# Altium PCB Power.PcbDoc
Units mil, origin at the board's own origin, x right, y up, seen from the top; angles counter-clockwise.
Board outline 2440 x 3265 mil, 2 copper layers (Top Layer, Bottom Layer); 32 components, 26 nets, 96 pads, 39 vias.
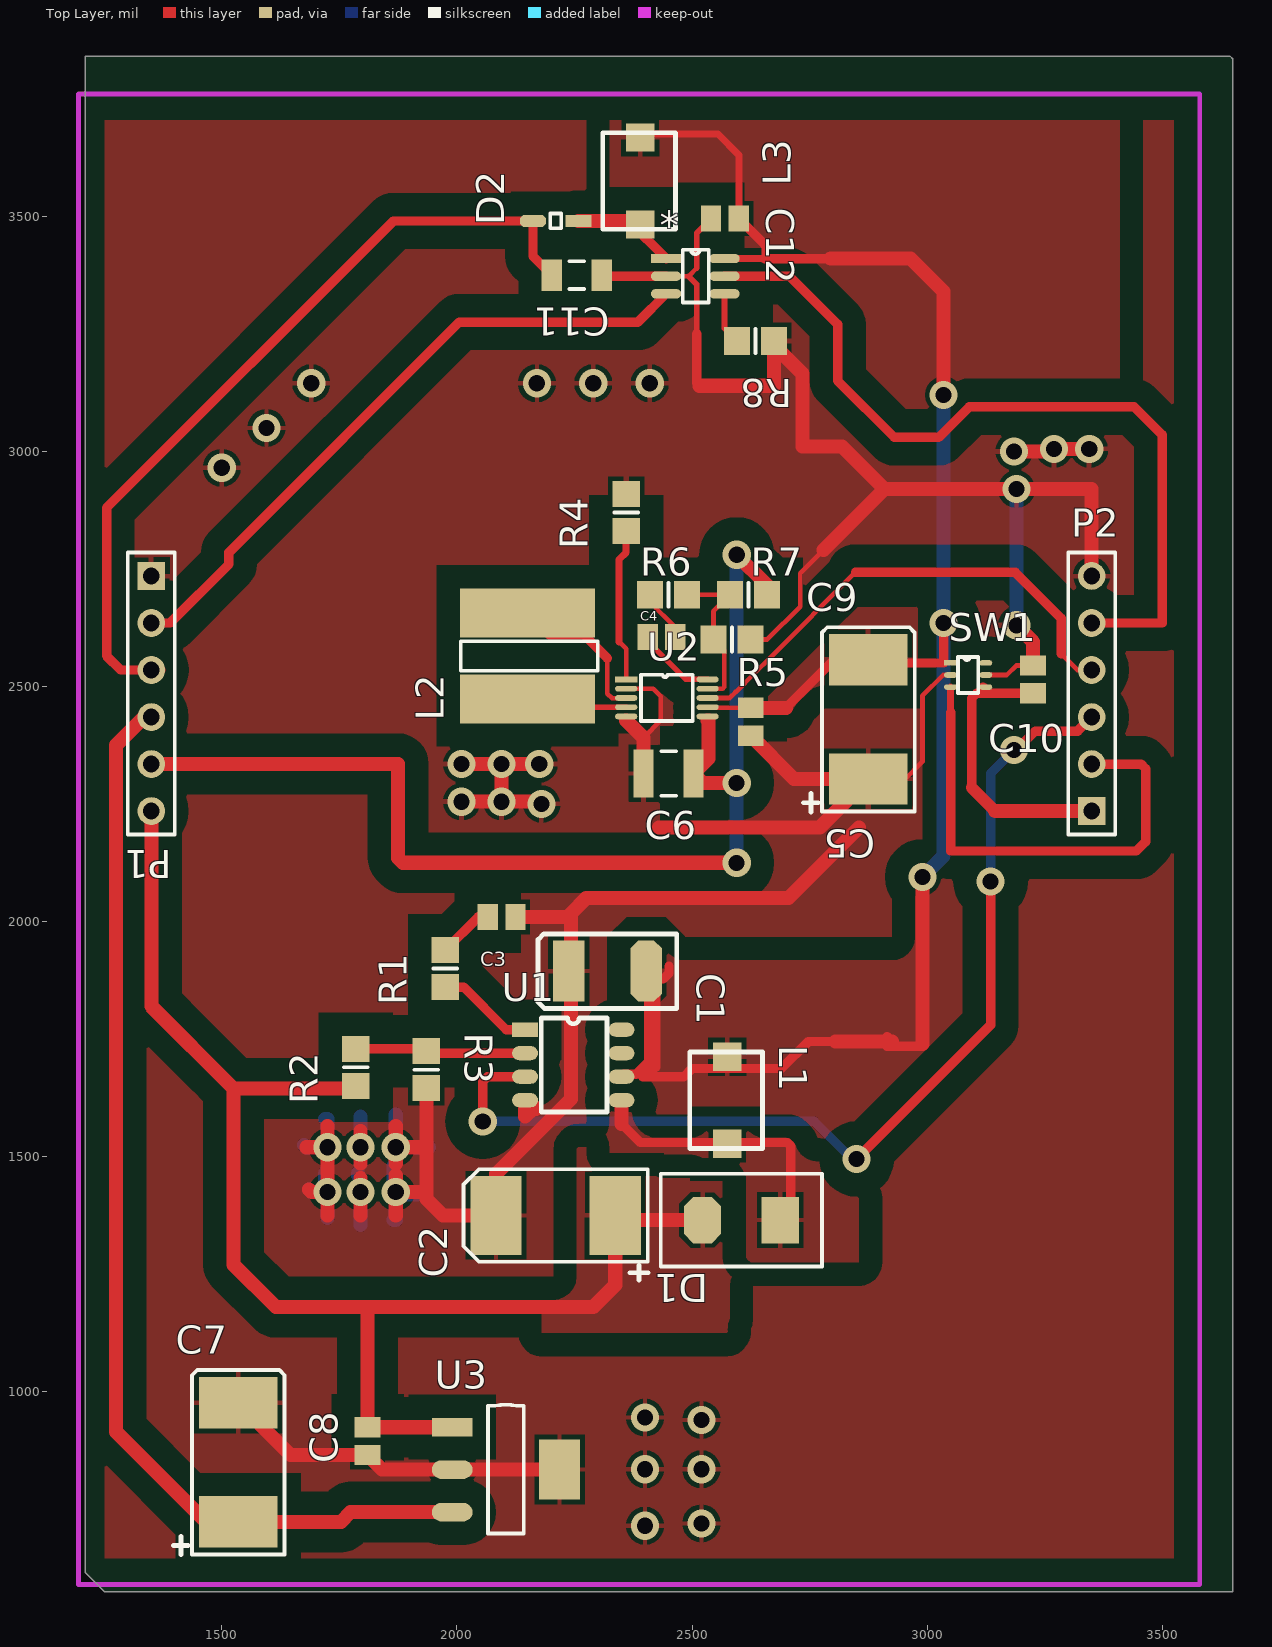
[diagram p0: Top Layer view]
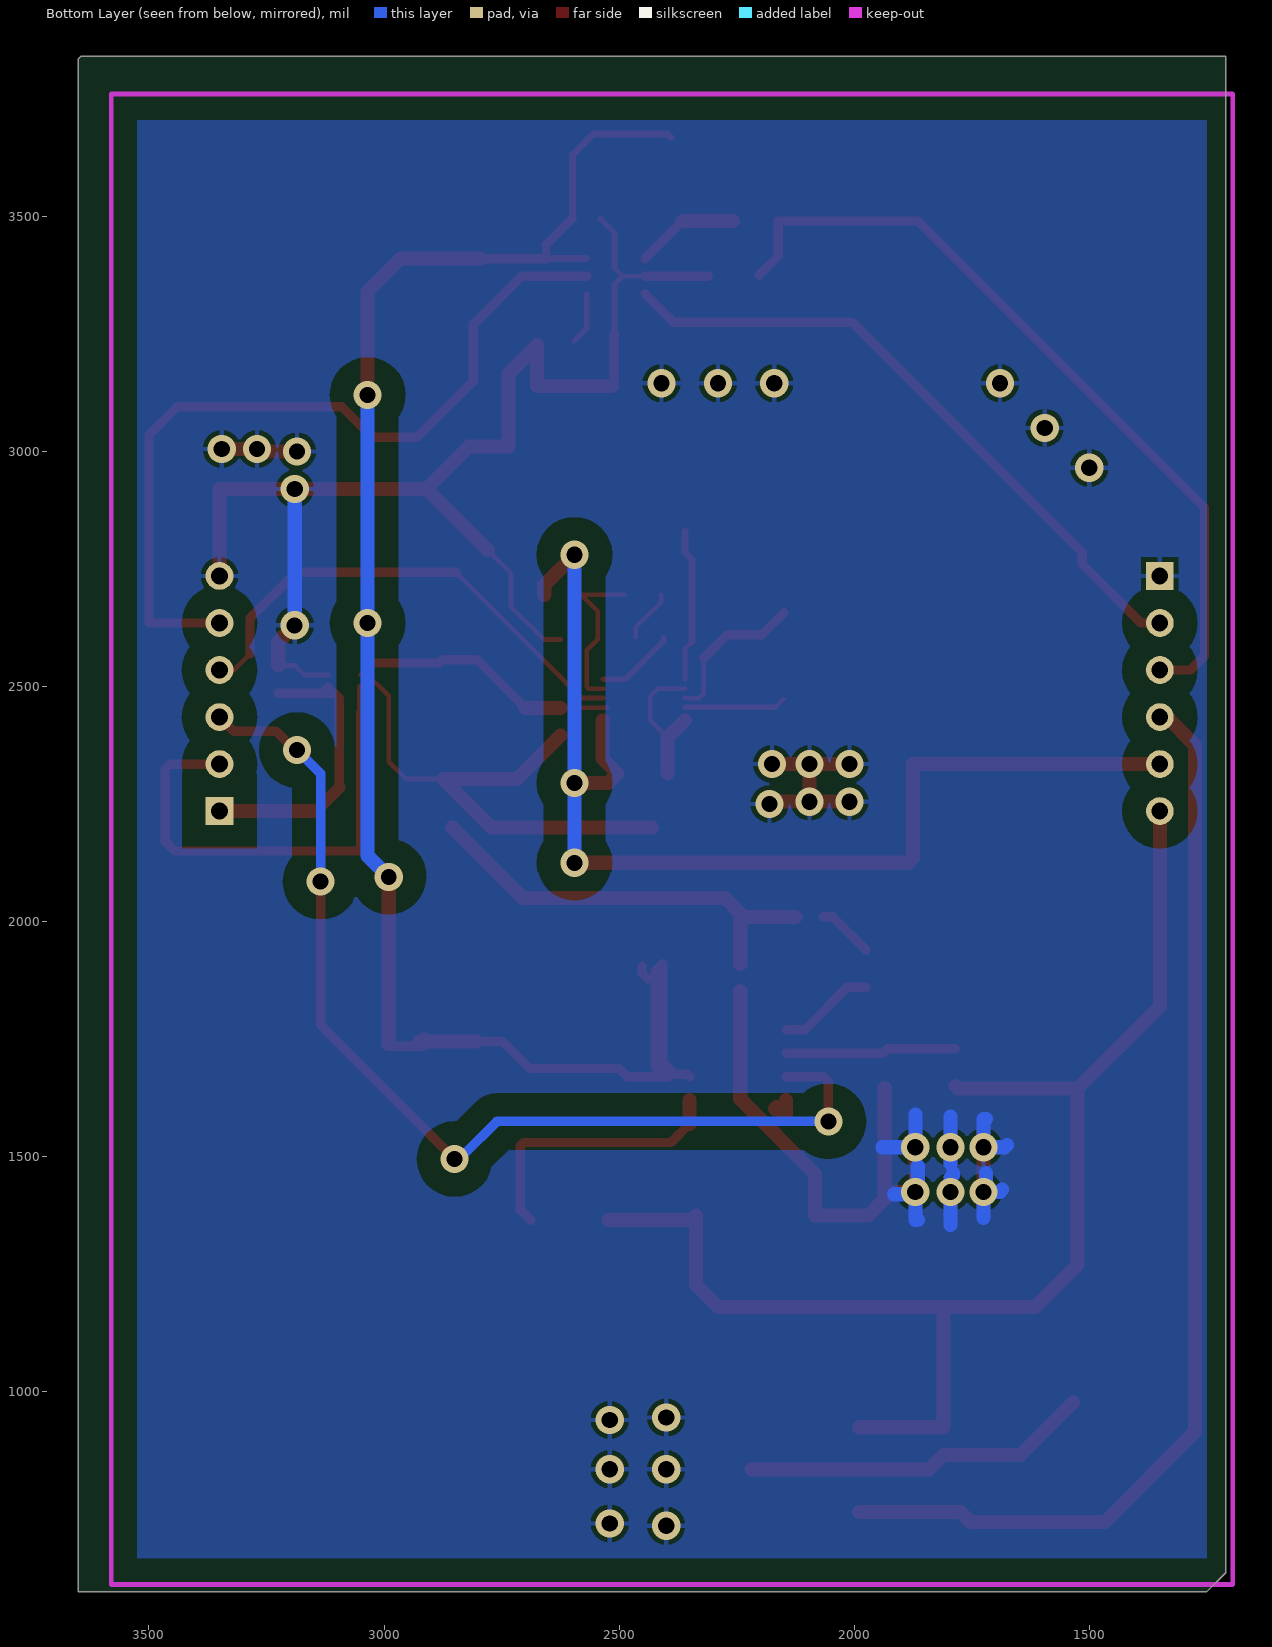
[diagram p1: Bottom Layer view, seen from below]

## Layer stack, top to bottom
Top Layer: signal copper 1.4
Dielectric: dielectric 12.6, FR-4, Dk 4.8
Bottom Layer: signal copper 1.4

## Board outline
1250,575 1210,615 1210,3840 3645,3840 3650,3835 3650,575

## Design rules (kind name [scope] priority, off if disabled: settings)
Clearance Polygon [InPoly] p1: gap=50
Clearance [All] p2: gap=7
ComponentClearance [All] p1: gap=5 collisioncheckmode=3 verticalgap=10 showdistances=FALSE
PolygonConnect [All] p1: connectstyle=Relief reliefconductorwidth=10 reliefentries=4 polygonreliefangle="90 Angle" airgapwidth=10
RoutingVias [All] p1: holewidth=28 width=50 viastyle="Through Hole" minholewidth=28 minwidth=50 maxholewidth=28 maxwidth=50
SilkToSilkClearance [All] p1: silktosilkclearance=5
SilkscreenOverComponentPads [All] p1: minsilkscreentomaskgap=10
SolderMaskExpansion [All] p1: expansion=4
Width [All] p1: maxlimit=30 minlimit=10 preferedwidth=20
25 further rules are at their usual default settings.

## Components (designator, comment, footprint, x,y, rotation, side; value= is the part's Value field where it differs from the comment)
* "LT1932" SOT6 2445,3410 r0 top
C1 "Cap" C0805 2095,2010 r180 top
C2 "220u" C2917 2210,1375 r180 top
C3 "47u" C2312 2320,1895 r180 top
C4 "1500pF" C0805 2435,2605 r0 top
C5 "10u" C0805 2625,2425 r90 top
C6 "22u" C1210 2450,2315 r0 top
C7 "220u" C2917 1535,850 r90 top
C8 ".47u" C0805 1810,895 r90 top
C9 "220u" C2917 2875,2430 r90 top
C10 "4.7uF" C0805 3225,2515 r270 top
C11 "1u" C1206 2255,3375 r180 top
C12 "4.7u" C0805 2570,3495 r0 top
D1 "D Schottky" ShottkeyDiode 2605,1365 r180 top
D2 "D Schottky" ZHCSDiode 2210,3490 r180 top
L1 "4.7u" Inductor 2575,1620 r270 top
L2 "10uH" "10uH Inductor" 2150,2565 r90 top
L3 "4.7u" Inductor 2390,3575 r270 top
P1 "Header 6" HDR1X6 1350,2735 r270 top
P2 "Header 6" HDR1X6 3350,2235 r90 top
R1 "47k" 6-0805_M 1975,1900 r90 top
R2 "309k" 6-0805_M 1785,1690 r90 top
R3 "100K" 6-0805_M 1935,1685 r270 top
R4 "60.4k" 6-0805_M 2360,2870 r90 top
R5 "200k" 6-0805_M 2585,2600 r180 top
R6 "15k" 6-0805_M 2450,2695 r0 top
R7 "340k" 6-0805_M 2620,2695 r0 top
R8 "1.27k" 6-0805_M 2635,3235 r180 top
SW1 "SIP32411" "SOT6 - DUPLICATE" 3050,2550 r0 top
U1 "LTC1308ACS8" SOP8_LTC1308A 2145,1770 r0 top
U2 "LTC3440" MS10 2360,2515 r0 top
U3 "LM3940" LDO 1990,925 r0 top

## Footprints (in the part's own frame and the unit in brackets; to place one, negate y for a bottom-side part, rotate by r counter-clockwise, add the part's x,y. Pads: shape width x height; smd on the part's side, far side on the other; paste and mask are expansions set on the pad)
6-0805_M [mm] "Chip Resistor, Body 2.0x1.2mm, IPC Low Density"
  rect 1.4x1.5 smd: 1(-1,0) 2(1,0)
  silkscreen extent 0,-0.65 0,0.65, body extent -1.07,-0.7 1.07,0.7, height 0.7
"10uH Inductor" [mm]
  rect 2.65x7.3 smd: 1(-2.325,0) 2(2.325,0)
  silkscreen extent -0.8,-3.8 0.8,3.6
C0805 [mm] "Chip Capacitor, Body 2.0x1.3mm, IPC High Density"
  rect 1.1x1.4 smd: 1(-0.75,0) 2(0.75,0)
  body extent -1.1,-0.72 1.1,0.72, height 1.4
C1206 [mm] "Chip Capacitor, Body 3.2x1.6mm, IPC High Density"
  rect 1.1x1.7 smd: 1(-1.35,0) 2(1.35,0)
  silkscreen extent -0.4,-0.75 0.4,0.75, body extent -1.7,-0.9 1.7,0.9, height 1.3
C1210 [mm] "Chip Capacitor, Body 3.2x2.5mm, IPC High Density"
  rect 1.1x2.6 smd: 1(-1.35,0) 2(1.35,0)
  silkscreen extent -0.4,-1.2 0.4,1.2, body extent -1.7,-1.35 1.7,1.35, height 1.3
C2312 [mil]
  oct 66.93x130 smd: 1(-82.5,0)
  rect 66.93x130 smd: 2(82.5,0)
  silkscreen extent -148,-79 148,80
C2917 [mm]
  rect 2.77x4.25 smd: 1(-3.22,0) 2(3.22,0)
  silkscreen extent -5,-2.5 4.98,3.5
HDR1X6 [mm] "Connector; Header; 6 Position"
  rect 1.5x1.5 hole 0.9: 1(0,0)
  round 1.5 hole 0.9: 2(2.54,0) 3(5.08,0) 4(7.62,0) 5(10.16,0) 6(12.7,0)
  silkscreen extent -1.27,-1.27 13.97,1.27
Inductor [mil]
  rect 60x60 smd: 1(-92.5,0) 2(92.5,0)
  silkscreen extent -103,-80 103,75
LDO [mm]
  rect 2.2x1 smd: 1(0,0)
  oval 2.2x1 smd: 2(0,-2.3) 3(0,-4.6)
  rect 2.2x3.25 smd: 4(5.8,-2.3)
  silkscreen extent 1.93,-5.75 3.87,1.2
MS10 [mm]
  rect 1.2x0.31 smd: 1(0,0)
  oval 1.2x0.31 smd: 2(0,-0.5) 3(0,-1) 4(0,-1.5) 5(0,-2) 6(4.4,-2) 7(4.4,-1.5) 8(4.4,-1) 9(4.4,-0.5) 10(4.4,0)
  silkscreen extent 0.8,-2.25 3.6,0.25
ShottkeyDiode [mm]
  rect 2x2.5 smd: A(-2.1,0)
  oct 2x2.5 smd: K(2.1,0)
  silkscreen extent -4.35,-2.5 4.35,2.5
SOP8_LTC1308A [mil]
  rect 55x30 smd: 1(0,0)
  oval 55x30 smd: 2(0,-50) 3(0,-100) 4(0,-150) 5(205,-150) 6(205,-100) 7(205,-50) 8(205,0)
  silkscreen extent 34,-175 174,25
SOT6 [mm]
  rect 1.65x0.5 smd: 1(0,0)
  oval 1.65x0.5 smd: 2(0,-0.95) 3(0,-1.9) 4(3.15,-1.9) 5(3.15,-0.95) 6(3.15,0)
  silkscreen extent 0.9,-2.38 2.3,0.48
"SOT6 - DUPLICATE" [mm]
  rect 0.7x0.3 smd: 1(0,0)
  oval 0.7x0.3 smd: 2(0,-0.65) 3(0,-1.3) 4(1.9,-1.3) 5(1.9,-0.65) 6(1.9,0)
  silkscreen extent 0.4,-1.63 1.5,0.33
ZHCSDiode [mm]
  rect 1.4x0.65 smd: A(-1.225,0)
  oct 1.4x0.65 smd: K(1.225,0)
  silkscreen extent -0.3,-0.4 0.3,0.4

## Part data
C1: "Capacitor"
C2 C3: library part "Cap Pol1", "Polarized Capacitor (Radial)"
C4 C5 C6 C7 C8 C9 C10 C11 C12: library part Cap, "Capacitor"
D1 D2: "Schottky Diode"
L1 L2 L3: library part Inductor, "Inductor"
P1 P2: "Header, 6-Pin"
R1 R2 R3 R4 R5 R6 R7 R8: library part Res1, "Resistor"

## Via types
v1: diameter 60, hole 34.53, Top Layer to Bottom Layer, 31 vias
v2: diameter 60, hole 34, Top Layer to Bottom Layer, 8 vias

## Nets (pads, with @x,y where several pads share a name; then routed paths per layer and width w, separated by ;. In a path a pad name is that pad's centre, name@x,y a point inside that pad or via, vN(x,y) a via of type N, cw(c..) or ccw(c..) an arc to the next point about the centre after c; other vN are vias at no path point)
3.3SDN: P2.4 U2.8 | length 1057.3
  Top Layer w10: U2.8 2579.92,2475.63 2592.47,2488.18 2593.18,2488.18 2635,2530 2665,2560 2847.63,2742.63 ; 3285,2570 3320,2535 P2.4
  Top Layer w20: 2847.63,2742.63 3187.37,2742.63 3285,2645 3285,2570
3.3VSW: C6.2 P1.5 R7.2 U2.6 | length 2448.4
  Top Layer w30: P1.5 1875,2335 1875,2135 1885,2125 v2(2595,2125) ; 2533.23,2427.53 2535,2427.53 2535,2346.85 C6.2 2523.15,2295 v2(2595,2295) ; v1(2595,2780) 2659.37,2715.63 R7.2
  Bottom Layer w30: v2(2595,2125) v2(2595,2295) v1(2595,2780) v1@2595,2785
/SHDN: P2.3 U1.3 | length 2185.9
  Top Layer w20: v1(2055,1575) 2055,1660 2065,1670 U1.3 ; v1(2850,1495) 3135,1780 v2(3135,2085) ; v2(3185,2365) 3190,2365 3230,2405 3320,2405 P2.3
  Bottom Layer w20: v1(2055,1575) 2760,1575 v1@2830,1505 ; v2(3135,2085) 3135,2315 v2(3185,2365)
GND: *.2 C1.1 C2.2 C3.2 C5.1 C6.1 C7.2 C8.1 C9.1 C10.1 C11.1 C12.1 P1.1 P2.6 R3.2 R4.2 R5.1 R8.1 SW1.2 SW1.5 U1.4 U2.2 U2.5 U3.2 U3.4 | length 9032.8
  Top Layer w10: U2.2 2417.61,2495.32 2433.62,2479.31 2433.62,2427.76 2396.85,2390.99 ; *.2 2492.6,3372.6 2510,3390 ; R5.1 2660,2600 2730,2670 2730,2740.63 2779.37,2790 ; C9.1 2953.23,2303.23 2990,2340 2990,2480 3034.41,2524.41 SW1.2 ; SW1.5@3118.9,2524.41 3169.41,2524.41 3189.53,2544.53 C10.1
  Top Layer w12: C11.1 C11.1@2310.55,3372.6 ; 2492.6,3372.6 2510,3355.2 2510,3250 ; 2510,3390 2510,3464.53 C12.1
  Top Layer w20: C11.1@2310.55,3372.6 *.2 ; 2510,3250 2510,3145 2515.63,3139.37
  Top Layer w30: C7.2 1646.3,865.47 C8.1 1841.02,834.45 U3.2 U3.4 ; 1680,1520 v1(1725,1520) ; 1685.31,1430 1690.31,1425 v1(1725,1425) ; v1@1720,1420 v1(1725,1425) ; v1@1720,1525 v1(1725,1520) ; 1725,1375 v1(1725,1425) ; 1725,1565 v1(1725,1520) ; 1795,1375 v1(1795,1425) 1795,1455 ; 1795,1485.31 v1(1795,1520) 1795,1554.69 ; 1870,1375 v1(1870,1425) ; 1870,1459.69 v1(1870,1425) ; 1870,1485.31 v1(1870,1520) ; 1870,1565 v1(1870,1520) ; 1920,1425 v1(1870,1425) ; 1930,1520 v1(1870,1520) ; R3.2 1935,1410 1970,1375 C2.2 2083.23,1463.23 2242.5,1622.5 C3.2@2242.5,1852.5 ; v1(2010,2255) v1(2095,2255) ; v1(2010,2335) v1(2095,2335) ; C1.1 2235,2010 2242.5,2017.5 ; U1.4 2145,1585 2161.98,1601.98 ; 2148.02,1601.98 2161.98,1601.98 ; v1@2175,2255 v1(2095,2255) ; v1(2175,2335) v1(2095,2335) ; C3.2@2242.5,1910 2242.5,2017.5 ; 2360,2427.84 2396.85,2390.99 C6.1 ; 2430,2200 2766.77,2200 ; 2515.63,3139.37 2674.37,3139.37 2674.37,3225.63 2735,3165 2735,3010 2819.37,3010 2909.37,2920 ; C5.1 2717.24,2303.23 C9.1 2771.77,2200 ; 2779.37,2790 2909.37,2920 ; 2855,2200 2705,2050 2275,2050 2242.5,2017.5 ; v1(3185,3000) v1@3265,3000 ; v2(3190,2630) 3225,2595 C10.1 ; v1(3270,3005) v1(3345,3005) ; P2.6 3350,2920 v1(3190,2920) 2909.37,2920 ; v1(1725,1425) v1(1725,1520) ; v1(2095,2255) v1(2095,2335) ; 2161.98,1601.98 2168.02,1601.98 2165,1605 2161.98,1601.98
  Bottom Layer w30: 1675,1525 1680,1520 v1(1725,1520) 1725,1580 1720,1580 ; 1685.31,1430 1690.31,1425 v1(1725,1425) ; 1720,1464.69 1720,1430 v1(1725,1425) ; 1725,1370 v1(1725,1425) ; 1790,1464.69 1790,1460 1795,1455 v1(1795,1425) 1795,1355 ; 1795,1485.31 v1(1795,1520) 1795,1585 ; 1865,1365 1870,1365 v1(1870,1425) ; 1865,1480.31 1865,1430 v1(1870,1425) ; 1870,1590 v1(1870,1520) 1940,1520 ; 1915,1420 1875,1420 v1(1870,1425) ; v2(3190,2630) v1(3190,2920)
  other v1: 2400,715 2520,720 2400,835 2520,835 2520,940 2400,945 2180,2250 1500,2965 1595,3050 1690,3145 2170,3145 2290,3145 2410,3145
LBI: U1.7
LBO: U1.8
LDO3: C7.1 P1.4 U3.3 | length 2362.8
  Top Layer w30: P1.4 1335,2435 1275,2375 1275,915 1466.77,723.23 C7.1 1753.23,723.23 1773.9,743.9 U3.3
"LED SHD": *.5 P2.5 | length 1745
  Top Layer w20: *.5 2707.4,3372.6 2810,3270 2810,3150 2930,3030 3025,3030 3090,3095 3440,3095 3500,3035 3500,2635 P2.5
LEDA: C11.2 D2.K P1.3 | length 1733.5
  Top Layer w20: P1.3@1370,2535 P1.3 1285,2535 1255,2565 1255,2880 1865,3490 D2.K 2161.77,3415.08 C11.2
LEDK: *.3 P1.2 | length 1399.7
  Top Layer w20: P1.2 1390,2635 1515,2760 1515,2785 2005,3275 2384.8,3275 *.3
Net*_1: *.1 D2.A L3.2 | length 219.9
  Top Layer w20: L3.2@2365,3490 *.1
  Top Layer w30: D2.A L3.2@2365,3490
Net*_4: *.4 R8.2 | length 111.2
  Top Layer w12: *.4 2569.02,3261.61 R8.2
NetC1_2: C1.2 R1.2 | length 119.7
  Top Layer w20: R1.2 2045.63,2010 C1.2
NetC4_1: C4.1 U2.10 | length 170
  Top Layer w12: C4.1 2405.47,2596.46 2486.93,2515 U2.10
NetC4_2: C4.2 R6.1 | length 112.3
  Top Layer w10: R6.1 2410.63,2679.37 2464.53,2625.47 C4.2
NetL2_1: L2.1 U2.4 | length 217.3
  Top Layer w10: L2.1 L2.1@2167.52,2455.95
  Top Layer w12: L2.1@2167.52,2455.95 U2.4
NetL2_2: L2.2 U2.3 | length 329.4
  Top Layer w10: 2320,2560 2320,2485 2330,2475 2359.37,2475 U2.3
  Top Layer w20: L2.2 2196.54,2610 2270,2610 2310,2570 2320,2560
NetR1_1: R1.1 U1.1 | length 207.5
  Top Layer w20: R1.1 2014.37,1860.63 2105,1770 U1.1
NetR2_2: R2.2 R3.1 U1.2 | length 363.9
  Top Layer w20: R2.2 1930,1729.37 R3.1 1939.37,1720 U1.2
NetR4_1: R4.1 U2.1 | length 328.1
  Top Layer w10: 2345,2595 2360,2580 U2.1
  Top Layer w15: 2345,2595 2345,2770 2360,2785 R4.1
NetR5_2: R5.2 R6.2 R7.1 U2.9 | length 348.6
  Top Layer w10: R6.2 R7.1 2545.63,2660 R5.2 2568.85,2576.78 2568.85,2498.85 2565.32,2495.32 U2.9
ON/OFF: P2.2 SW1.3 | length 1046.2
  Top Layer w15: 3050,2445 SW1.3
  Top Layer w20: 3050,2445 3050,2150 3445,2150 3465,2170 3465,2325 3455,2335 P2.2
SW: D1.A L1.2 U1.5 | length 596.4
  Top Layer w20: 2350,1570 2390,1530 2702.5,1530 2710,1522.5 2710,1387.32 D1.A
  Top Layer w30: 2350,1570 U1.5
VBAT: C10.2 P2.1 SW1.4 | length 711.6
  Top Layer w20: 3095,2285 3095,2474.92 3105.55,2485.47 C10.2 3132.24,2485.47 SW1.4@3118.9,2498.82
  Top Layer w25: 3095,2285 3145,2235
  Top Layer w30: 3145,2235 P2.1
VIN: *.6 C3.1 C5.2 C9.2 C12.2 L1.1 L3.1 SW1.1 U1.6 U2.7 | length 4520.9
  Top Layer w10: U2.7@2525.35,2455.95 2526.77,2454.53 C5.2
  Top Layer w15: L3.1 2397.5,3675 2555,3675 2599.53,3630.47 C12.2 ; *.6 2655,3410 2655,3439.53
  Top Layer w20: U1.6 2355,1675 2381.14,1675 2407.5,1701.36 2407.5,1910 2422.84,1894.66 2422.84,1697.84 ; 2439.23,1878.27 2450.96,1890 2450.96,1905 ; C12.2 2655,3439.53 ; 2655,3410 2795,3410 ; 2699.53,2454.53 2801.77,2556.77 C9.2 2881.77,2550 3035,2550 v2(3035,2635) ; 2805,1745 2747.5,1745 2690,1687.5 2500,1687.5 2482.5,1670 2400,1670 ; 2914.73,1735 2985,1735 2990,1740 ; 2914.73,1755.27 2925,1745 2935,1735 ; 2400,1670 2400,1675 ; 2400,1670 2395,1670 2400,1675 ; 2400,1675 2414.75,1689.75 ; 2400,1675 2400,1685 2404.75,1689.75 2414.75,1689.75 ; 2414.75,1689.75 2422.84,1697.84 ; 2414.75,1689.75 2422.84,1689.75 2422.84,1697.84
  Top Layer w30: C5.2 2699.53,2454.53 ; 2795,3410 2965,3410 3035,3340 v2(3035,3120) ; 2805,1745 2925,1745 ; 2990,1740 v2@2990,2110
  Bottom Layer w20: v2@2990,2110 v2@3005,2110
  Bottom Layer w30: v2@3005,2110 3035,2140 v2(3035,2635) v2(3035,3120)
  other v2: 2990,2095
VOUT5: C2.1 C8.2 D1.K P1.6 R2.1 U3.1 | length 2941.8
  Top Layer w30: P1.6 1350,1820 1525,1645 ; R2.1 1779.37,1645 1525,1645 ; U3.1 1989.53,924.53 C8.2 1810,1180 ; D1.K 2346.77,1365 C2.1 2336.77,1226.77 2290,1180 1810,1180 ; 1525,1645 1525,1270 1615,1180 1810,1180
pads on no net: SW1.6

## Polygon pours and split planes (outlines as drawn)
GND on Top Layer "Grnd" (solid, pour order 37): 1245,3775 3620,3775 3620,610 1245,610 1235,639.17
GND on Top Layer "Switch" (solid, pour order 28): 1435.22,2100.47 1435.22,1120.47 1445.22,1130.47 3050.22,1130.47 3050.22,2100.47
VIN on Top Layer "Switch" (solid, remove dead copper, pour order 26): 2395.31,1917.27 2395.31,1457.27 3110.31,1457.27 3110.31,1917.27
VOUT5 on Top Layer "Switch" (solid, pour order 22): 2255,1520 2255,1150 2260,1155 2580,1155 2580,1490 2555,1515
SW on Top Layer "Switch" (solid, pour order 21): 2320,1645 2325,1640 2325,1525 2325,1505 2615,1505 2615,1285 2620,1280 2625,1275 2855,1275 2855,1634.51 2845.47,1644.04
VIN on Top Layer "Switch" (solid, pour order 20): 2325,1825 2325,1540 3040,1540 3045,1545 3045,1820 3045,1815
VIN on Top Layer "Vin" (solid, remove dead copper, pour order 35): 2325,3750 2325,2990 3435,2990 3409.48,3020 3409.48,3735
GND on Top Layer "GRND" (solid, remove dead copper, pour order 34): 1475,2265 1475,1150 3215,1150 3255,1110 3230,1135 3230,2245
VOUT5 on Top Layer "5V" (solid, pour order 33): 2180.55,1480 2180.55,1125 2175,1120 2180.55,1125 2630,1125 2630,1440 2602.26,1465
SW on Top Layer "SW" (solid, pour order 32): 2625,1495 2630,1489.49 2630,1170 2845,1170 2835,1181.02 2835,1495
SW on Top Layer "SW" (solid, pour order 31): 2309.69,1675 2895.93,1675 2895.93,1468.35 2910,1462.09 2905.31,1460 2305,1460
VIN on Top Layer "Vin" (solid, pour order 29): 2325,2175 2330,2168.64 2330,1660 3115,1660 3125,1672.72 3085,1723.58 3085,2155.93
VIN on Top Layer "Vin" (solid, remove dead copper, pour order 25): 2465,2665 2475,2655 2475,2385 2980,2385 2980,2670
GND on Top Layer "grnd" (solid, remove dead copper, pour order 24): 1950,3075 2798.48,3075 3137.88,3075 3137.88,2186.76 3150,2170 3137.88,2186.76 1962.12,2186.76
GND on Top Layer "grnd" (solid, pour order 23): 3130,3075 3130,2791.96 3144.73,2780 3405,2780 3405,3067.03 3395.18,3075
GND on Bottom Layer "Grnd" (solid, pour order 38): 1210,3730.31 1215,3725.46 1215,594.85 3655,594.85 3660,590 3640,609.38 3640,3740
GND on Bottom Layer "Switch" (solid, pour order 30): 1450,2105 1450,1125 3055,1125 3060,1130 3065,1135 3065,2105

## Keep-outs
Keep-Out Layer:
  lines w10: 1195,590 1195,3760 1210,3760 3580,3760 3580,590 1195,590